# Altium PCB PCB2.PcbDoc
Units mil, origin at the board's own origin, x right, y up, seen from the top; angles counter-clockwise.
Board outline 1023.62 x 1181.1 mil, 2 copper layers (Top Layer, Bottom Layer); 27 components, 30 nets, 153 pads, 49 vias.
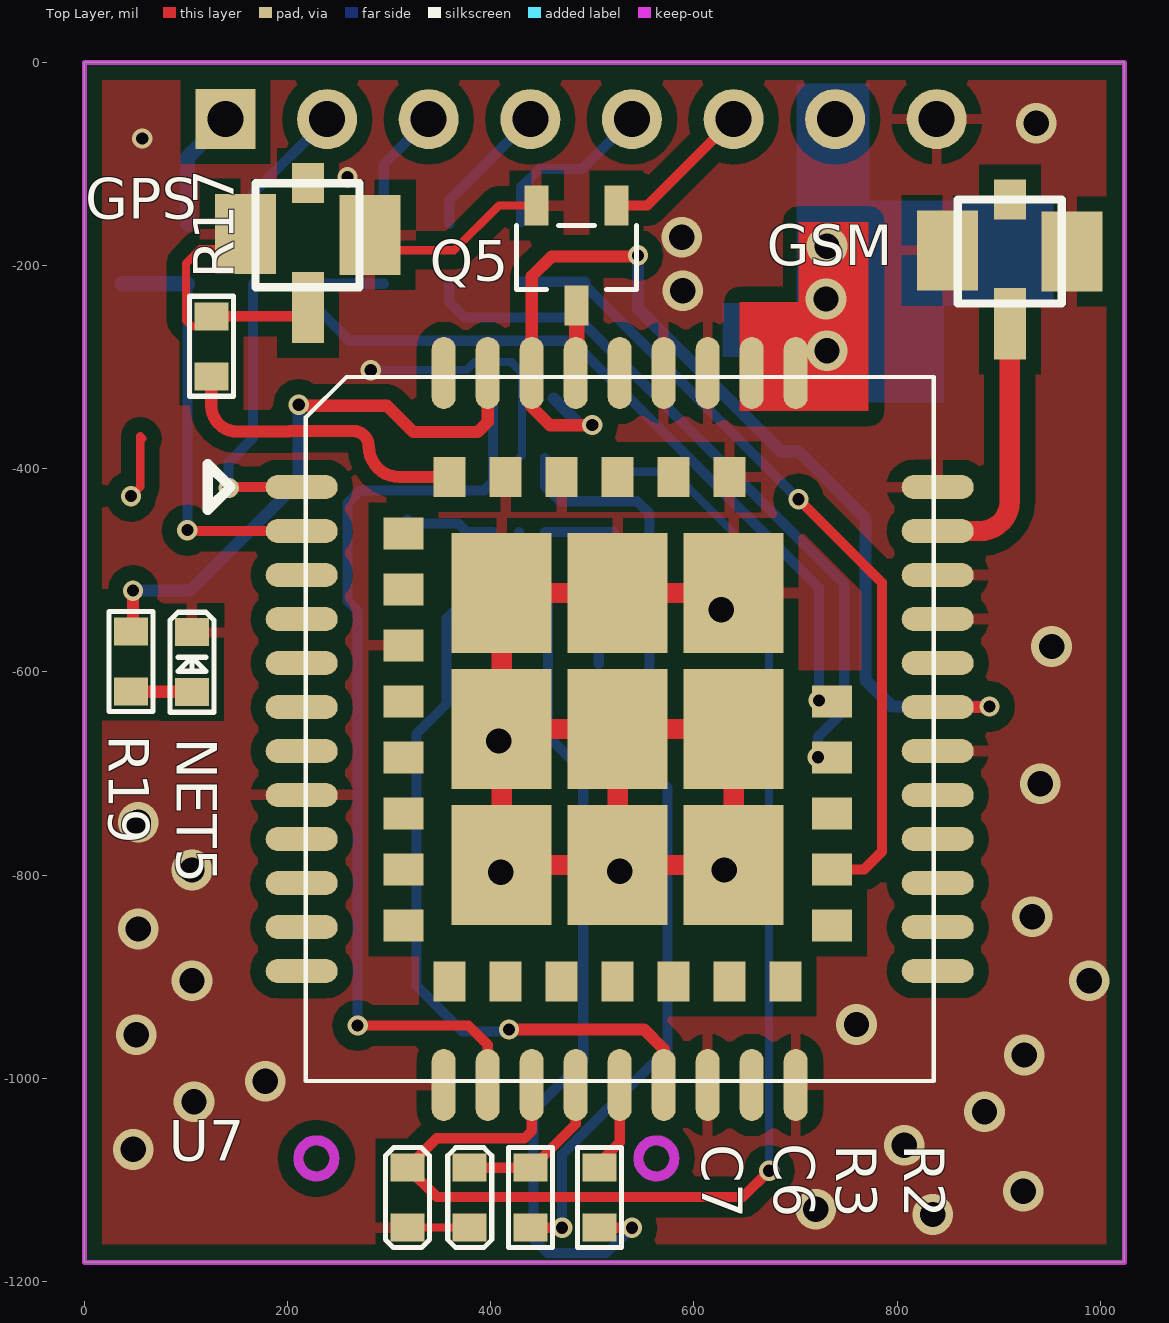
[diagram p0: Top Layer view]
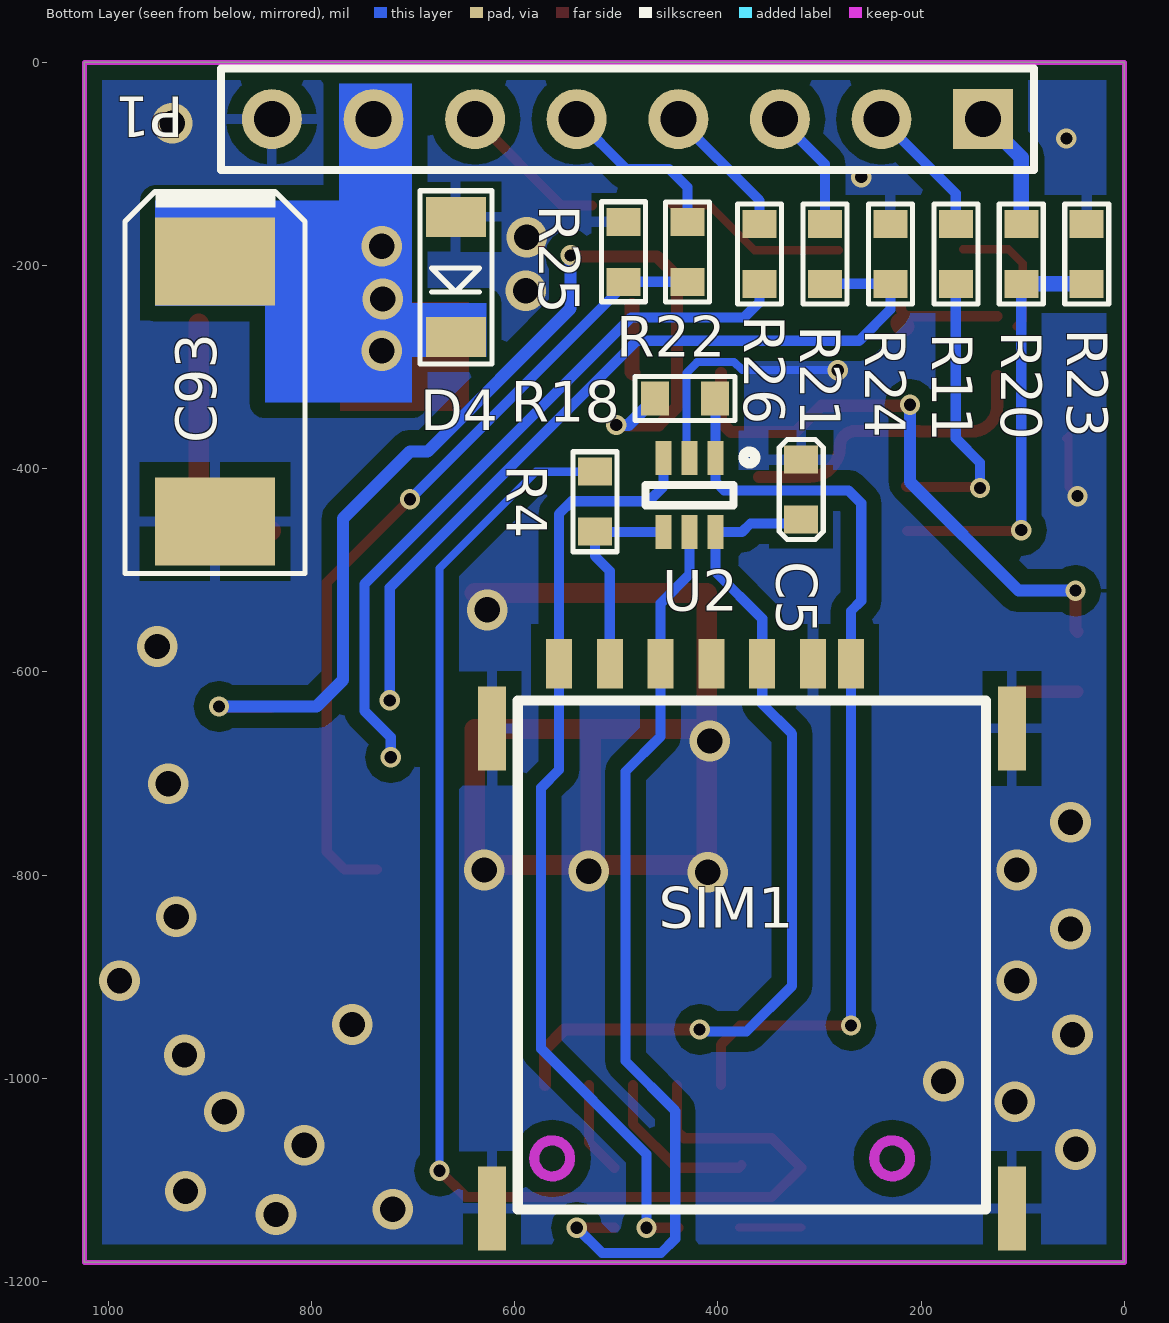
[diagram p1: Bottom Layer view, seen from below]

## Layer stack, top to bottom
Top Layer: signal copper 1.4
Dielectric: dielectric 12.6, FR-4, Dk 4.8
Bottom Layer: signal copper 1.4

## Board outline
0,-1181.1 1023.62,-1181.1 1023.62,0 0,0

## Design rules (kind name [scope] priority, off if disabled: settings)
Clearance gnd [InPolygon And InNet(GND)] p1: gap=15
Clearance [All] p2: gap=10
PolygonConnect PolygonConnect_1 [IsVia] p1: connectstyle=Direct reliefconductorwidth=10 reliefentries=4 polygonreliefangle="90 Angle"
PolygonConnect [All] p2: connectstyle=Relief reliefconductorwidth=10 reliefentries=4 polygonreliefangle="90 Angle"
RoutingVias [All] p1: holewidth=28 width=50 viastyle="Through Hole" minholewidth=28 minwidth=50 maxholewidth=28 maxwidth=50
SilkscreenOverComponentPads [All] p1: minsilkscreentomaskgap=10
SolderMaskExpansion [All] p1: expansion=4
Width [All] p1: maxlimit=200 minlimit=8 preferedwidth=10
27 further rules are at their usual default settings.

## Components (designator, comment, footprint, x,y, rotation, side; value= is the part's Value field where it differs from the comment)
C5 "33pF/10V" 0603C 318,-391 r270 bottom
C6 "22pF/10V" 0603C 379.33,-1087.94 r270 top
C7 "22pF/10V" 0603C 318,-1087.94 r270 top
C93 "1000uF/6.3V" 7343 895,-196 r270 bottom
D4 "MMSZ5231BT1G" SOD123 658,-152 r270 bottom
GPS "IPX" IPX 169,-169 r180 top (schematic designator GSM_ANT1)
GSM "IPX" IPX 860,-185 r180 top (schematic designator GSM_ANT2)
NET5 "LED" 0603LED 106,-620 r90 top
P1 "Header 8" HDR1X8 139,-56 r0 bottom
Q5 "S8050" SOT23-3 524,-141 r90 top
R2 "10R/5%" 0603R 507,-1147 r90 top
R3 "10R/5%" 0603R 439,-1147 r90 top
R4 "10R/5%" 0603R 521,-462 r90 bottom
R11 "1K" 0603R 165.86,-218 r90 bottom
R17 "0" 0603R 125,-309 r90 top
R18 "10K" 0603R 403,-331 r0 bottom
R19 "1K" 0603r 46,-619.45 r90 top
R20 "10K" 0603R 101.43,-158.94 r270 bottom
R21 "10K" 0603R 294.71,-158.94 r270 bottom
R22 "10K" 0603R 430,-157 r270 bottom
R23 "140K" 0603R 37,-218 r90 bottom
R24 "140K" 0603R 230.29,-218 r90 bottom
R25 "140K" 0603R 493,-216 r90 bottom
R26 "1K" 0603R 359.14,-218 r90 bottom
SIM1 "nano sim" "Nano SIM" 269,-592 r180 bottom
U2 "SMF05C" SC70-6L 428,-426 r270 bottom
U7 "SIM868E/SIM68" SIM868 214,-418 r0 top

## Footprints (in the part's own frame and the unit in brackets; to place one, negate y for a bottom-side part, rotate by r counter-clockwise, add the part's x,y. Pads: shape width x height; smd on the part's side, far side on the other; paste and mask are expansions set on the pad)
0603C [mm]
  rect 0.7x0.85 smd: 1(0,0) 2(1.5,0)
  silkscreen extent -0.5,-0.55 2,0.55
0603LED [mm]
  rect 0.7x0.85 smd: 1(0,0) 2(1.5,0)
  silkscreen extent -0.5,-0.55 2,0.55
0603R [mm]
  rect 0.7x0.85 smd: 1(0,0) 2(1.5,0)
  silkscreen extent -0.5,-0.55 2,0.55
0603r [mm]
  rect 0.7x0.85 smd: 1(0,0) 2(1.5,0)
  silkscreen extent -0.5,-0.55 2,0.55
7343 [mm]
  rect 2.2x3 smd: 1(0,0) 2(6.5,0)
  silkscreen extent -1.75,-2.25 7.8,2.25
HDR1X8 [mm] "Connector; Header; 8 Position"
  rect 1.5x1.5 hole 0.9: 1(0,0)
  round 1.5 hole 0.9: 2(2.54,0) 3(5.08,0) 4(7.62,0) 5(10.16,0) 6(12.7,0) 7(15.24,0) 8(17.78,0)
  silkscreen extent -1.27,-1.27 19.05,1.27
IPX [mil]
  rect 60x78.74 smd: 1(10.36,0) 3(-112,1)
  rect 31.5x70 smd: 2(-51,72.36)
  rect 31.5x39.37 smd: ""(-51,-50)
  silkscreen extent -102,-50 0,52
"Nano SIM" [mm]
  rect 0.7x2.1 smd: 0(-8.97,-13.615) 0(-8.97,-1.615) 0(4.02,-13.615) 0(4.02,-1.615)
  rect 0.65x1.23 smd: 1(-2.22,0) 2(-4.76,0) 3(-7.3,0) 5(-0.95,0) 6(-3.49,0) 7(-6.03,0) 8(0,0)
  Keep-Out Layer circle w0.254: c1.03,-12.365 r0.45
  Keep-Out Layer circle w0.254: c-7.47,-12.365 r0.45
  silkscreen extent -8.33,-13.64 3.38,-0.91
SC70-6L [mm]
  rect 0.85x0.4 smd: 1(-0.925,0.65) 2(-0.925,0) 3(-0.925,-0.65) 4(0.925,-0.65) 5(0.925,0) 6(0.925,0.65)
  silkscreen extent -1.09,-1.1 0.25,1.65
SIM868 [mm]
  oval 1.8x0.6 smd: 1(0,0) 2(0,-1.1) 3(0,-2.2) 4(0,-3.3) 5(0,-4.4) 6(0,-5.5) 7(0,-6.6) 8(0,-7.7) 9(0,-8.8) 10(0,-9.9) 11(0,-11) 12(0,-12.1) 22(15.9,-12.1) 23(15.9,-11) 24(15.9,-9.9) 25(15.9,-8.8) 26(15.9,-7.7) 27(15.9,-6.6) 28(15.9,-5.5) 29(15.9,-4.4) 30(15.9,-3.3) 31(15.9,-2.2) 32(15.9,-1.1) 33(15.9,0)
  oval 0.6x1.8 smd: 13(3.55,-14.95) 14(4.65,-14.95) 15(5.75,-14.95) 16(6.85,-14.95) 17(7.95,-14.95) 18(9.05,-14.95) 19(10.15,-14.95) 20(11.25,-14.95) 21(12.35,-14.95) 34(12.35,2.85) 35(11.25,2.85) 36(10.15,2.85) 37(9.05,2.85) 38(7.95,2.85) 39(6.85,2.85) 40(5.75,2.85) 41(4.65,2.85) 42(3.55,2.85)
  rect 1x0.8 smd: 43(2.549,-1.159) 44(2.549,-2.559) 45(2.549,-3.959) 46(2.549,-5.359) 47(2.549,-6.759) 48(2.549,-8.159) 49(2.549,-9.559) 50(2.549,-10.959) 58(13.251,-10.959) 59(13.251,-9.559) 60(13.251,-8.159) 61(13.251,-6.759) 62(13.251,-5.359)
  rect 0.8x1 smd: 51(3.7,-12.359) 52(5.1,-12.359) 53(6.5,-12.359) 54(7.9,-12.359) 55(9.3,-12.359) 56(10.7,-12.359) 57(12.1,-12.359) 63(10.7,0.25) 64(9.3,0.25) 65(7.9,0.25) 66(6.5,0.25) 67(5.1,0.25) 68(3.7,0.25)
  rect 2.5x3 smd: 69(5,-2.65) 70(5,-6.05) 71(5,-9.45) 72(7.9,-9.45) 73(10.8,-9.45) 74(10.8,-6.05) 75(10.8,-2.65) 76(7.9,-2.65) 77(7.9,-6.05)
  silkscreen extent -2.35,-14.85 15.8,2.75
SOD123 [mm]
  rect 1x1.5 smd: 1(0,0) 2(3,0)
  silkscreen extent -0.65,-0.9 3.68,0.9
SOT23-3 [mm]
  rect 1x0.6 smd: 1(0,0) 2(0,2) 3(-2.5,1)
  silkscreen extent -2.1,-0.5 -0.5,2.5

## Part data
C5 C6 C7: library part Cap, "Capacitor"
C93: library part "Cap Pol1", "Polarized Capacitor (Radial)"
D4: library part "Diode 10TQ040", "Schottky Rectifier"
GPS GSM: library part IPEX, "IPEX座"
NET5: library part LED2, "Typical RED, GREEN, YELLOW, AMBER GaAs LED"
P1: "Header, 8-Pin"
Q5: library part NPN
R2 R3 R4 R11 R17 R18 R20 R21 R22 R23 R24 R25 R26: library part Res2, "Resistor"
R19: library part R
U7: library part SIM868E/SIM868

## Via types
v1: diameter 40, hole 25, Top Layer to Bottom Layer, tented both sides, 30 vias
v2: diameter 20, hole 12, Top Layer to Bottom Layer, tented both sides, 17 vias
v3: diameter 20, hole 12, Top Layer to Bottom Layer, 2 vias

## Nets (pads, with @x,y where several pads share a name; then routed paths per layer and width w, separated by ;. In a path a pad name is that pad's centre, name@x,y a point inside that pad or via, vN(x,y) a via of type N, cw(c..) or ccw(c..) an arc to the next point about the centre after c; other vN are vias at no path point)
BT_ANT: U7.20
GND: C5.1 C6.2 C7.2 C93.2 D4.1 GPS.1 GPS.3 GSM.1 GSM.3 NET5.2 P1.8 Q5.2 R23.2 R24.2 R25.2 SIM1.0 SIM1.5 U2.2 U7.8 U7.13 U7.19 U7.21 U7.27 U7.30 U7.31 U7.33 U7.36 U7.37 U7.45 U7.63 U7.66 U7.67 U7.69 U7.70 U7.71 U7.72 U7.73 U7.74 U7.75 U7.76 U7.77 | length 1833.1
  Top Layer w8: 105.94,-260 100,-254.06 100,-198 114,-184 GPS.1@158.64,-184 ; GPS.3@281,-185 364,-185 408,-141 Q5.2 ; C7.2 C6.2
  Top Layer w20: U7.77@526.84,-656.19 U7.74 U7.73 U7.72 ; U7.75 U7.76 U7.69 U7.70 ; U7.70 U7.77 U7.72 ; U7.70 U7.71 U7.72
  Bottom Layer w8: v2(282,-303) 376,-303 384,-295 420,-295 cw(c420,-296) 421,-296 430.78,-305.78 430.78,-386.8 U2.2
  other v1: 835,-1134 720,-1129 924,-1111 48,-1070 807,-1066 886,-1033 108,-1023 178,-1003 925,-977 51,-957 760,-947 106,-904 989,-904 53,-853 933,-841 410,-797 527,-796 106,-795 630,-795 53,-748 941,-710 408,-668 952,-575 627,-539 589,-225 588,-172 937,-60
  other v2: 259,-113 57,-75
GNSS_EN: R22.2 R25.1 U7.59 | length 805.5
  Top Layer w10: v2(703,-430) 785,-512 785,-777 767.65,-794.35 U7.59
  Bottom Layer w10: R22.2 430.06,-216 R25.1 492.94,-216.06 492.94,-219.94 v2(703,-430) v2@703,-426
GNSS_EN_IN: P1.5 R22.1 | length 170.8
  Bottom Layer w10: R22.1 430,-123 448,-105 490,-105 P1.5
GNSS_RXD: R21.2 R24.1 U7.62 | length 806.8
  Bottom Layer w10: R21.2 R24.1 230.29,-243.29 261,-274 480,-274 723,-517 v3(723,-628)
GNSS_TXD: R26.1 U7.61 | length 703
  Bottom Layer w10: R26.1 359.14,-236.14 374,-251 485.28,-251 748,-513.72 748,-638.36 722,-664.36 v3(722,-684)
GSM_ANT: GSM.2 U7.32 | length 265.1
  Top Layer w20: GSM.2 911,-431.62 cw(c881.31,-431.62) 881.31,-461.31 U7.32 ; U7.32 cw(c840.29,-461.31) U7.32@840.29,-461 ; U7.32 cw(c840.29,-461.31) U7.32@840.29,-461 ; U7.32 cw(c840.29,-461.31) U7.32@840.29,-461 ; U7.32 cw(c840.29,-461.31) U7.32@840.29,-461 ; U7.32 cw(c840.29,-461.31) U7.32@840.29,-461 ; U7.32 cw(c840.29,-461.31) U7.32@840.29,-461
GSM_RXD: R20.2 R23.1 U7.2 | length 418.5
  Top Layer w10: v2@102.31,-461.31 U7.2
  Bottom Layer w10: v2(101.43,-460.43) R20.2
  Bottom Layer w15: R23.1 R20.2
GSM_TXD: R11.1 U7.1 | length 284.7
  Top Layer w10: v2(142,-419) 143,-418 U7.1 U7.1@215,-417
  Bottom Layer w10: v2(142,-419) 142,-394 165.86,-370.14 R11.1
NetGPS_2: GPS.2 R17.2 | length 105.6
  Top Layer w10: R17.2 211.42,-249.94 ccw(c211.42,-241.36) GPS.2
  Top Layer w20: GPS.2@216.36,-260 ccw(c216.36,-256.36) GPS.2@220,-256.36
NetNET5_1: NET5.1 R19.1 | length 60.2
  Top Layer w12: R19.1 105.45,-619.45 NET5.1
NetR2_1: R2.1 SIM1.2 U2.5 | length 996.1
  Top Layer w10: R2.1@502,-1147 R2.1 v2(539,-1147)
  Bottom Layer w10: U2.5 428,-504 456.4,-532.4 SIM1.2 456.4,-663.4 491,-698 491,-983 442,-1032 ; 442,-1136 442,-1032 ; v2(539,-1147) 514,-1172 456,-1172 442,-1158 442,-1032
NetR3_1: R3.1 SIM1.3 U2.3 | length 926
  Top Layer w10: R3.1 v2(470.27,-1147)
  Bottom Layer w10: U2.3 453.59,-417.59 466.68,-430.68 467.68,-430.68 468.99,-432 544,-432 556.4,-444.4 SIM1.3 556.4,-696.4 574,-714 574,-971 470.27,-1074.73 v2(470.27,-1147)
NetR4_1: R4.1 SIM1.7 U2.4 | length 203.6
  Bottom Layer w10: U2.4 520.58,-462.42 R4.1 521,-486 506.4,-500.6 SIM1.7
NetR17_1: R17.1 U7.68 | length 304.3
  Top Layer w12: R17.1 125,-338 ccw(c150.39,-338) 150.39,-363.39 201.99,-363.39 ccw(c195,-363) 202,-363 265,-363 cw(c265,-378) 280,-378 ccw(c310.16,-378) 310.16,-408.16 U7.68
NetR19_2: R19.2 U7.41 | length 574.7
  Top Layer w12: R19.2 48,-558.39 v2(48,-520) ; v2(211,-337) 211,-338 298,-338 324,-364 387,-364 397.07,-353.93 U7.41
  Bottom Layer w12: v2(48,-520) 104,-520 211,-413 v2(211,-337)
PWRKEY: Q5.3 U7.39 | length 66.8
  Top Layer w15: U7.39 484.63,-304.85 Q5.3
PWRKEY_IN: P1.6 Q5.1 | length 150.2
  Top Layer w10: Q5.1 554,-141 P1.6
SIM800_VBAT: C93.1 D4.2 P1.7 U7.34 U7.35
  other v1: 731,-284 730,-233 731,-181
SIMC_CLK: C6.1 R3.2 U7.16 | length 164.3
  Top Layer w10: C6.1@376.68,-1085.3 C6.1 R3.2 440.67,-1087.94 483.68,-1044.93 U7.16
SIMC_DATA: C7.1 R4.2 U7.15 | length 1354.5
  Top Layer w10: U7.15 440.38,-1051.79 433.17,-1059 346.94,-1059 C7.1 346.78,-1116.72 648.28,-1116.72 v2(674,-1091)
  Bottom Layer w8: R4.2 578.94,-402.94 674,-498 674,-1064 ; v2(674,-1091) 674,-1064 ; 674,-1072 674,-1064
SIMC_DET: R18.1 SIM1.8 U2.1 U7.14 | length 927.7
  Top Layer w10: v2(269,-948) 378,-948 397.07,-967.07 U7.14
  Bottom Layer w10: v2(269,-948) SIM1.8 269,-540 259,-530 259,-434 271.72,-421.28 393.72,-421.28 402.41,-412.59 U2.1 402.41,-331.59 R18.1
SIMC_RST: R2.2 U7.17 | length 91.7
  Top Layer w10: R2.2@502,-1087.94 526.99,-1062.95 U7.17
UART1_RXD: P1.2 R11.2 | length 133.2
  Bottom Layer w10: R11.2 165.86,-129.14 P1.2
UART1_TXD: P1.1 R20.1 | length 118.5
  Bottom Layer w15: R20.1 101.43,-93.57 P1.1
UART3_RXD: P1.4 R26.2 | length 136
  Bottom Layer w10: R26.2 359.14,-135.86 P1.4
UART3_TXD: P1.3 R21.1 | length 121.3
  Bottom Layer w10: R21.1 294.71,-100.29 P1.3
VBUS: U7.26
VDD_EXT: R18.2 U7.28 U7.40 | length 1062.3
  Top Layer w12: v2(500,-357) 499.77,-357.23 458.23,-357.23 440.38,-339.38 U7.40 440.38,-210.62 460,-191 v2@545,-191 ; U7.28 890.46,-634.54 v2(891,-634)
  Bottom Layer w12: R18.2 488.06,-357 v2(500,-357) ; v2(545,-190) 545,-242.3 685.7,-383 703,-383 708,-388 713,-393 745,-425 769,-449 769,-608 795,-634 v2(891,-634)
VSIM: C5.2 SIM1.1 U2.6 U7.18 | length 874.6
  Top Layer w12: v2(418,-952) 551,-952 570.3,-971.3 U7.18
  Bottom Layer w10: C5.2 321.94,-454 368,-454 376.42,-462.42 U2.6 402.41,-501.59 356.4,-547.6 SIM1.1 356.4,-631.6 327,-661 327,-909 372,-954 418,-954 v2(418,-952)
pads on no net: GPS. GSM. SIM1.6 U7.3 U7.4 U7.5 U7.6 U7.7 U7.9 U7.10 U7.11 U7.12 U7.22 U7.23 U7.24 U7.25 U7.29 U7.38 U7.42 U7.43 U7.44 U7.46 U7.47 U7.48 U7.49 U7.50 U7.51 U7.52 U7.53 U7.54 U7.55 U7.56 U7.57 U7.58 U7.60 U7.64 U7.65
copper on no net: | length 65.8
  Top Layer w8: v2(46,-427) 55,-418 55,-368.06 57.21,-370.27

## Polygon pours and split planes (outlines as drawn)
GND on Top Layer "Top Layer-No Net" (solid, remove dead copper, pour order 1000): -255,164 -168,77 1140,77 1140,-1140 995,-1285 944,-1234 -270,-1234 -270,18 -182,106
GND on Bottom Layer "Top Layer-No Net" (solid, remove dead copper, pour order 1001): -95,134 916,134 1149,-99 1118,-130 1118,-1319 -183,-1319 -289,-1213 -35,-959 -35,136

## Keep-outs
Keep-Out Layer:
  the board outline again, w5

## Other copper
Top Layer:
  rectangle net SIM800_VBAT: 703,-245 772,-157
  rectangle net SIM800_VBAT: 645,-343 772,-236
Bottom Layer:
  rectangle net SIM800_VBAT: 701,-335 773,-21
  rectangle net SIM800_VBAT: 628,-290 737,-237
  rectangle net SIM800_VBAT: 727,-240 954,-136
  rectangle net SIM800_VBAT: 725,-335 846,-230

## Silkscreen, mask and mechanical layers (free items; w line width, h text height)
Mechanical 1:
  the board outline again, w5